# Altium PCB DriveBoard_V2.PcbDoc
Units mil, origin at the board's own origin, x right, y up, seen from the top; angles counter-clockwise.
Board outline 3149.61 x 1968.5 mil, 2 copper layers (Top Layer, Bottom Layer); 44 components, 41 nets, 152 pads, 152 vias.
Unrouted connection lines stored in the file: 1.
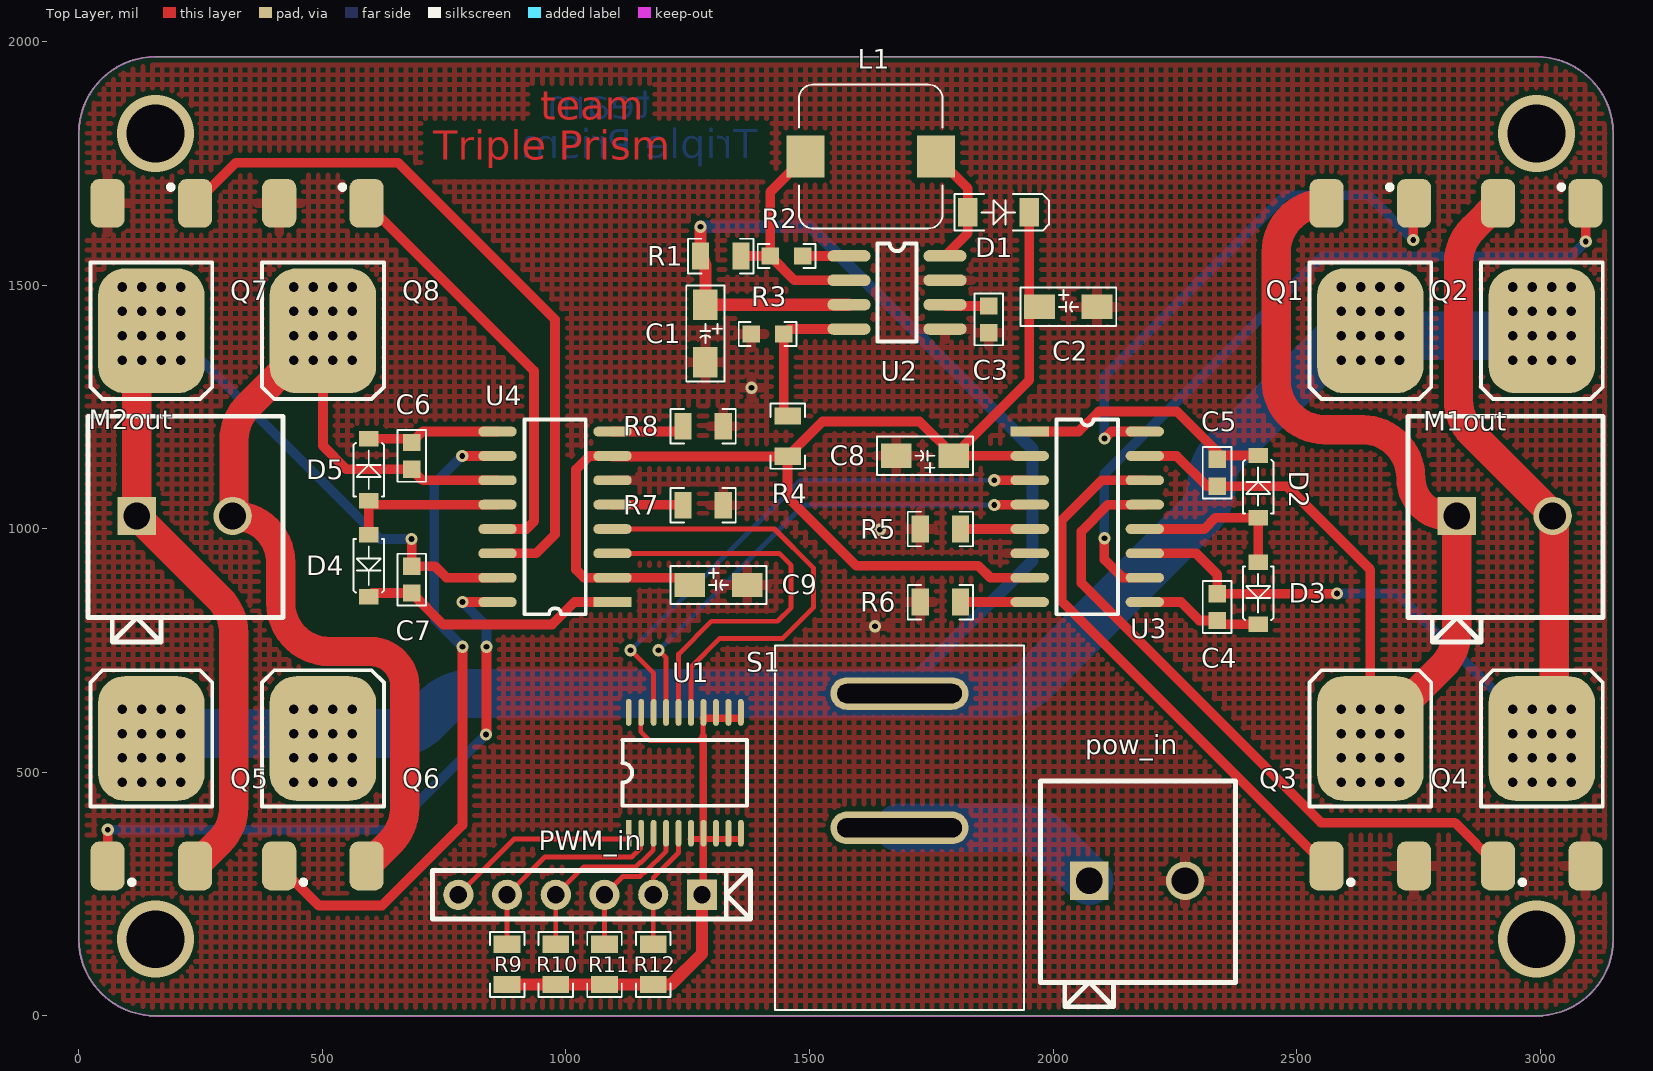
[diagram p0: Top Layer view]
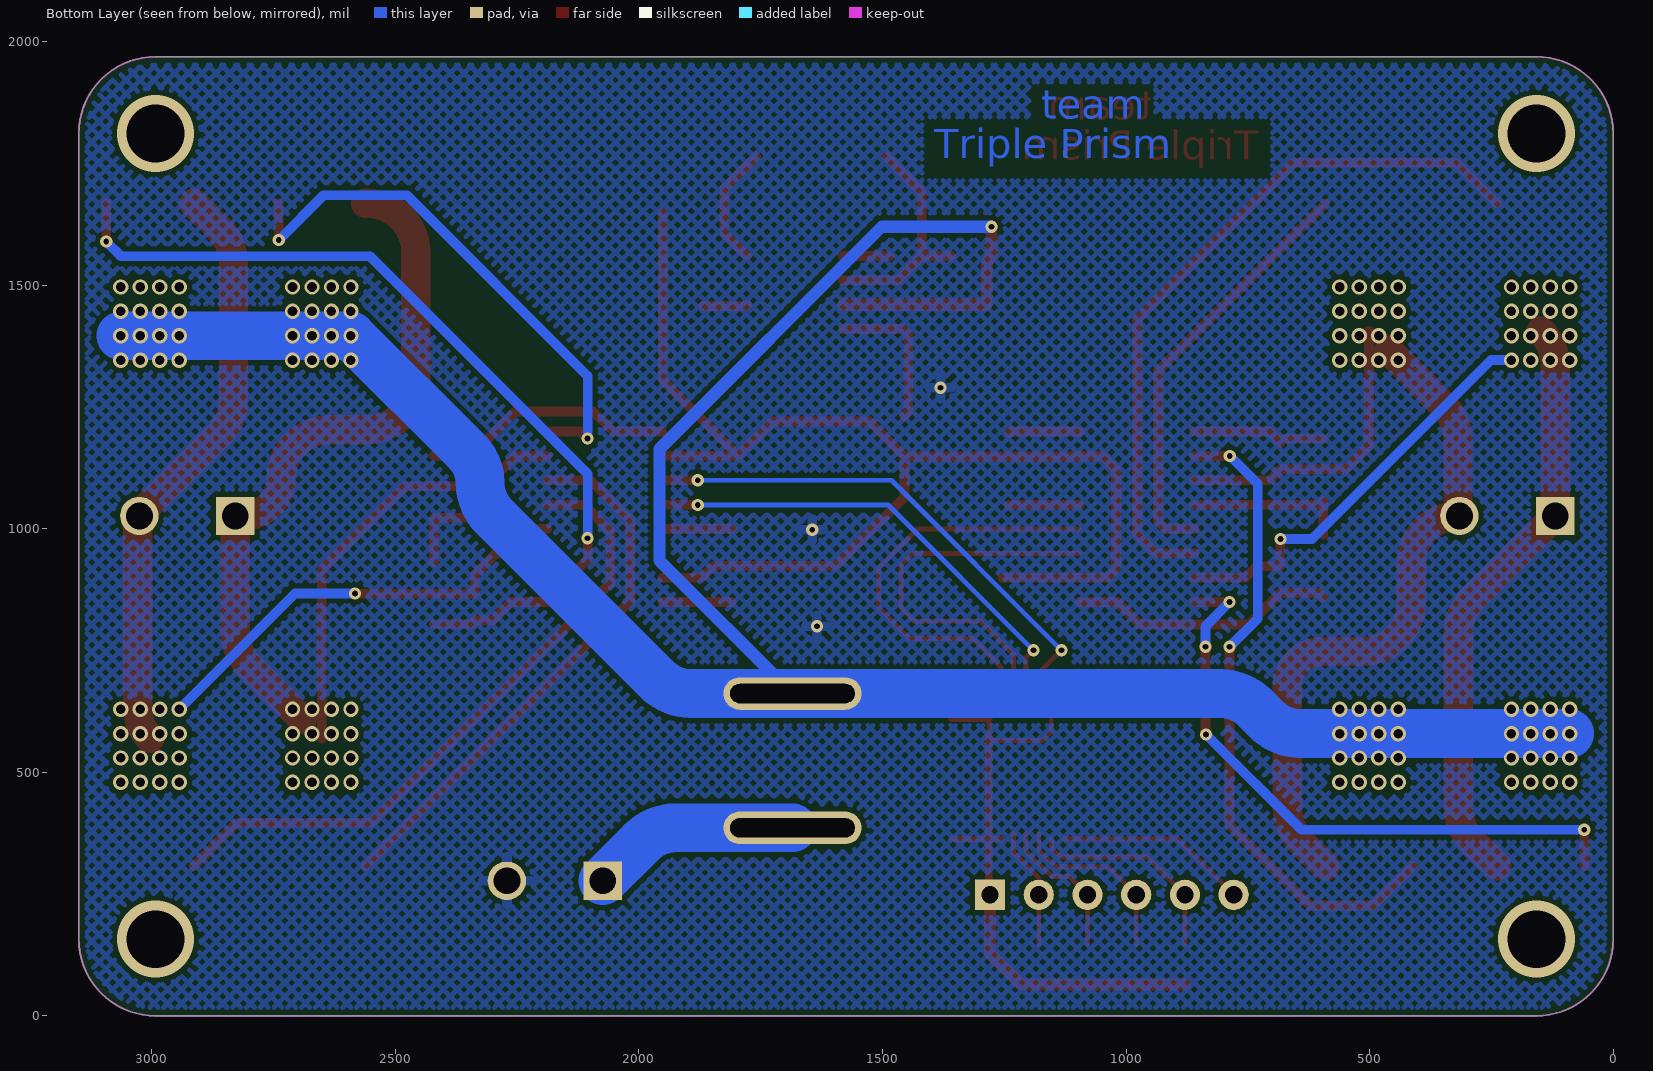
[diagram p1: Bottom Layer view, seen from below]

## Layer stack, top to bottom
Top Solder: solder mask 0.4, Solder Resist, Dk 3.5
Top Layer: signal copper 1.4
Dielectric 1: dielectric 12.6, FR-4, Dk 4.8
Bottom Layer: signal copper 1.4
Bottom Solder: solder mask 0.4, Solder Resist, Dk 3.5

## Board outline
0,157.48 0,1811.02 cw(c157.48,1811.02) 157.48,1968.5 2992.13,1968.5 cw(c2992.13,1811.02) 3149.61,1811.02 3149.61,157.48 cw(c2992.13,157.48) 2992.13,0 157.48,0 cw(c157.48,157.48)

## Design rules (kind name [scope] priority, off if disabled: settings)
Clearance [All] p1: gap=10
Clearance "Large Power Nets" [InNetClass('Large Power Nets')] p2: gap=20
PolygonConnect [All] p1: connectstyle=Relief reliefconductorwidth=20 reliefentries=4 polygonreliefangle="90 Angle" airgapwidth=10
RoutingCorners [All] p1: cornerstyle=Round minsetback=10 maxsetback=100
RoutingVias [All] p1: holewidth=28 width=50 viastyle="Through Hole" minholewidth=12 minwidth=24 maxholewidth=28 maxwidth=50
SolderMaskExpansion [All] p1: expansion=4
Width "Large Power Nets_1" [InNetClass('Large Power Nets')] p1: maxlimit=100 minlimit=10 preferedwidth=60
Width [All] p2: maxlimit=25 minlimit=10 preferedwidth=10
29 further rules are at their usual default settings.

## Classes and differential pairs
net class "Large Power Nets": 7V2 Netpow_in_1 OUT1+ OUT1- OUT2+ OUT2-

## Components (designator, comment, footprint, x,y, rotation, side; value= is the part's Value field where it differs from the comment)
C1 "Cap Pol1" "1206 C tan" 1286.22,1400.39 r270 top
C2 "Cap Pol1" "1206 C tan" 2031.1,1455.12 r0 top
C3 "Cap" "0603 C" 1867.72,1429.53 r90 top
C4 "Cap" "0603 C" 2336.62,838.98 r90 top
C5 "Cap" "0603 C" 2336.62,1114.63 r90 top
C6 "Cap" "0603 C" 683.46,1149.27 r270 top
C7 "Cap" "0603 C" 683.46,895.28 r270 top
C8 "Cap Pol1" "1206 C tan" 1737.01,1149.61 r180 top
C9 "Cap Pol1" "1206 C tan" 1312.99,884.25 r0 top
D1 "Diode" "1206 D" 1887.8,1649.21 r0 top
D2 "Diode" SOD-123 2420.87,1086.22 r90 top
D3 "Diode" SOD-123 2420.87,867.38 r270 top
D4 "Diode" SOD-123 595.27,923.69 r270 top
D5 "Diode" SOD-123 595.28,1120.87 r90 top
L1 "Inductor Iron" CDRH74R 1625.59,1763.78 r0 top
M1out "Header 2" "CONNECT 050-2" 2828.35,1025.98 r0 top
M2out "Header 2" "CONNECT 050-2" 118.9,1025.98 r0 top
pow_in "Header 2" "CONNECT 050-2" 2074.02,277.17 r0 top
PWM_in "Header 6" "Header P6" 1279.13,248.43 r180 top
Q1 "IRLR7843" LR7843 2650.94,1525.91 r90 top
Q2 "IRLR7843" LR7843 3003.15,1525.91 r90 top
Q3 "IRLR7843" LR7843 2650.94,449.29 r270 top
Q4 "IRLR7843" LR7843 3003.15,449.29 r270 top
Q5 "IRLR7843" LR7843 148.98,449.29 r270 top
Q6 "IRLR7843" LR7843 501.18,449.29 r270 top
Q7 "IRLR7843" LR7843 148.98,1525.91 r90 top
Q8 "IRLR7843" LR7843 501.18,1525.91 r90 top
R1 "Res2" "0805 R" 1317.72,1559.45 r0 top
R2 "Res2" "0603 R" 1452.76,1559.45 r180 top
R3 "Res2" "0603 R" 1413.78,1399.61 r180 top
R4 "Res2" "0805 R" 1455.12,1189.76 r90 top
R5 "Res2" "0805 R" 1768.5,999.21 r180 top
R6 "Res2" "0805 R" 1768.5,849.21 r180 top
R7 "Res2" "0805 R" 1281.5,1048.03 r0 top
R8 "Res2" "0805 R" 1281.5,1210.24 r0 top
R9 "Res2" "0805 R" 879.13,105.51 r270 top
R10 "Res2" "0805 R" 979.13,105.51 r270 top
R11 "Res2" "0805 R" 1079.13,105.51 r270 top
R12 "Res2" "0805 R" 1179.13,105.51 r270 top
S1 "SW-SPST" Switch 1684.65,385.83 r0 top
U1 "74LVC245A" SOT163-1 1128.74,374.8 r90 top
U2 "MC34063A" MC34063 1679.53,1484.65 r0 top
U3 "HIP4082" HIP4082 1951.97,1199.21 r0 top
U4 "HIP4082" HIP4082 1095.67,849.21 r180 top

## Footprints (in the part's own frame and the unit in brackets; to place one, negate y for a bottom-side part, rotate by r counter-clockwise, add the part's x,y. Pads: shape width x height; smd on the part's side, far side on the other; paste and mask are expansions set on the pad)
"0603 C" [mm]
  rect 0.9x0.9 smd: 1(-0.7,0) 2(0.7,0)
  silkscreen extent -1.35,-0.75 1.35,0.75, body extent -0.8,-0.4 0.8,0.4, height 0.8
"0603 R" [mm]
  rect 0.9x0.9 smd: 1(-0.85,0) 2(0.85,0)
  silkscreen extent -1.5,-0.63 1.5,0.63, body extent -0.8,-0.4 0.8,0.4, height 0.45
"0805 R" [mm]
  rect 0.9x1.4 smd: 1(-1.05,0) 2(1.05,0)
  silkscreen extent -1.7,-0.9 1.7,0.9, body extent -1,-0.63 1,0.63, height 0.5
"1206 C tan" [mm]
  rect 1.6x1.27 smd: 1(-1.5,0) 2(1.5,0)
  silkscreen extent -2.5,-1 2.5,1, body extent -1.6,-0.8 1.6,0.8, height 1.6
"1206 D" [mm]
  rect 1x1.5 smd: 1(-1.6,0) 2(1.6,0)
  silkscreen extent -2.3,-0.95 2.63,0.95
CDRH74R [mm]
  rect 2x2.2 smd: 1(-3.4,0) 2(3.4,0)
  silkscreen extent -3.75,-3.75 3.75,3.75, body extent -3.75,-3.75 3.75,3.75, height 4
"CONNECT 050-2" [mm]
  rect 2x2 hole 1.4: 1(0,0)
  round 2 hole 1.4: 2(5,0)
  silkscreen extent -2.54,-6.57 7.62,5.2, body extent -2.42,-2.5 7.58,5.5, height 11
"Header P6" [mil]
  rect 62x62 hole 35.5: 1(0,0)
  round 62 hole 35.5: 2(100,0) 3(200,0) 4(300,0) 5(400,0) 6(500,0)
  silkscreen extent -100,-50 553,50, body extent -50,-50 550,50, height 350
HIP4082 [mm]
  rect 2x0.51 smd: 1(0,0)
  oval 2x0.51 smd: 2(0,-1.27) 3(0,-2.54) 4(0,-3.81) 5(0,-5.08) 6(0,-6.35) 7(0,-7.62) 8(0,-8.89) 9(6,-8.89) 10(6,-7.62) 11(6,-6.35) 12(6,-5.08) 13(6,-3.81) 14(6,-2.54) 15(6,-1.27) 16(6,0)
  silkscreen extent 1.4,-9.52 4.6,0.64
LR7843 [mm]
  rrect50% 2.54x1.778 smd: 1(3.6,-2.28) 3(3.6,2.28)
  rrect50% 6.5x5.55 smd: 2(-3.048,0)
  silkscreen extent -6.6,-3.17 4.57,3.18
MC34063 [mm]
  oval 2.25x0.6 smd: 1(-2.5,1.905) 2(-2.5,0.635) 3(-2.5,-0.635) 4(-2.5,-1.905) 5(2.5,-1.905) 6(2.5,-0.635) 7(2.5,0.635) 8(2.5,1.905)
  silkscreen extent -1.02,-2.55 1.02,2.55
SOD-123 [mm]
  rect 0.8x1 smd: 1(-1.62,0) 2(1.62,0)
  silkscreen extent -1.4,-0.8 1.4,0.8
SOT163-1 [mm]
  rect 1.4x0.3 smd: 1(0,0)
  oval 1.4x0.3 smd: 2(0,-0.65) 3(0,-1.3) 4(0,-1.95) 5(0,-2.6) 6(0,-3.25) 7(0,-3.9) 8(0,-4.55) 9(0,-5.2) 10(0,-5.85) 11(6.3,-5.85) 12(6.3,-5.2) 13(6.3,-4.55) 14(6.3,-3.9) 15(6.3,-3.25) 16(6.3,-2.6) 17(6.3,-1.95) 18(6.3,-1.3) 19(6.3,-0.65) 20(6.3,0)
  silkscreen extent 1.44,-6.17 4.87,0.33
Switch [mm]
  oval 7.2x1.7 hole 1 slot 6.5 at 0 deg: 1(0,7) 2(0,0)
  silkscreen extent -6.5,-9.5 6.5,9.5, body extent -6.5,-9.5 6.5,9.5, height 15.5

## Part data
C1 C2 C8 C9: "Polarized Capacitor (Radial)"
C3 C4 C5 C6 C7: "Capacitor"
D1 D2 D3 D4 D5: "Default Diode"
L1: "Magnetic-Core Inductor"
M1out M2out pow_in: "Header, 2-Pin"
PWM_in: "Header, 6-Pin"
Q1 Q2 Q3 Q4 Q5 Q6 Q7 Q8: library part NMOS-2, "N-Channel Power MOSFET"
R1 R2 R3 R4 R5 R6 R7 R8 R9 R10 R11 R12: "Resistor"
S1: "Single-Pole, Single-Throw Switch"

## Via types
v1: diameter 31.5, hole 19.68, Top Layer to Bottom Layer, 128 vias
v2: diameter 25, hole 12, Top Layer to Bottom Layer, 20 vias
v3: diameter 157.48, hole 118.11, Top Layer to Bottom Layer, 4 vias

## Nets (pads, with @x,y where several pads share a name; then routed paths per layer and width w, separated by ;. In a path a pad name is that pad's centre, name@x,y a point inside that pad or via, vN(x,y) a via of type N, cw(c..) or ccw(c..) an arc to the next point about the centre after c; other vN are vias at no path point)
3V3: PWM_in.6 U1.1 U1.20 | length 396.1
  Top Layer w10: PWM_in.6 893.31,362.6 U1.1@1127.95,362.6
7V2: C1.1 Q1.2 Q2.2 Q5.2 Q6.2 R1.1 S1.1 U2.3 | length 5280.2
  Top Layer w25: v2(1275.98,1619.69) 1275.98,1560.4 ccw(c1277.33,1560.4) R1.1 cw(c1252.62,1535.69) 1286.22,1535.69 C1.1 1580.9,1459.45 U2.3
  Bottom Layer w25: v2(1275.98,1619.69) 1501.18,1619.69 1957.48,1163.39 1957.48,934.25 S1.1
  Bottom Layer w100: v1(88.98,579.29) v1(128.98,579.29) v1(168.98,579.29) v1(208.98,579.29) v1(441.18,579.29) v1(481.18,579.29) v1(521.18,579.29) v1(561.18,579.29) 641.41,579.29 ccw(c641.41,679.29) 712.12,608.58 735.67,632.13 cw(c806.38,561.42) 806.38,661.42 S1.1 1892.44,661.42 ccw(c1892.44,761.42) 1963.15,690.71 2296.7,1024.25 ccw(c2225.98,1094.96) 2325.98,1094.96 cw(c2412.85,1094.96) 2351.43,1156.39 v1(2590.94,1395.91) v1(2710.94,1395.91) v1(2983.15,1395.91) v1(3063.15,1395.91)
  other v1: 88.98,479.29 128.98,479.29 168.98,479.29 208.98,479.29 441.18,479.29 481.18,479.29 521.18,479.29 561.18,479.29 88.98,529.29 128.98,529.29 168.98,529.29 208.98,529.29 441.18,529.29 481.18,529.29 521.18,529.29 561.18,529.29 88.98,629.29 128.98,629.29 168.98,629.29 208.98,629.29 441.18,629.29 481.18,629.29 521.18,629.29 561.18,629.29 2590.94,1345.91 2630.94,1345.91 2670.94,1345.91 2710.94,1345.91 2943.15,1345.91 2983.15,1345.91 3023.15,1345.91 3063.15,1345.91 2630.94,1395.91 2670.94,1395.91 2943.15,1395.91 3023.15,1395.91 2590.94,1445.91 2630.94,1445.91 2670.94,1445.91 2710.94,1445.91 2943.15,1445.91 2983.15,1445.91 3023.15,1445.91 3063.15,1445.91 2590.94,1495.91 2630.94,1495.91 2670.94,1495.91 2710.94,1495.91 2943.15,1495.91 2983.15,1495.91 3023.15,1495.91 3063.15,1495.91
12V: C2.1 C8.1 C9.1 D1.2 R4.1 U3.2 U3.7 U4.2 U4.7 | length 2662.1
  Top Layer w20: C9.1@1253.94,899.21 U4.2 1037.01,899.21 1020.47,915.75 1020.47,1121.65 1048.03,1149.21 U4.7 1095.67,1148.11 R4.1@1454.8,1148.11 ; D1.2 1950.79,1304.33 C8.1 ; U3.7 1870.87,899.21 1846.46,923.62 1596.06,923.62 1454.8,1064.88 R4.1@1454.8,1148.11 ; U3.2 1951.57,1149.61 C8.1 ; R4.1@1454.8,1148.11 R4.1 1526.77,1220.08 1725.59,1220.08 C8.1
AHO1: Q2.1 U3.10 | length 1538.7
  Top Layer w20: v2(2105.12,980.32) 2105.12,936.61 2142.52,899.21 U3.10 ; Q2.1 3093.31,1667.25 v2(3093.31,1589.37)
  Bottom Layer w20: v2(2105.12,980.32) 2105.12,1112.6 2551.57,1559.06 3062.99,1559.06 v2(3093.31,1589.37)
AHO2: Q6.1 U4.10 | length 1356
  Top Layer w20: Q6.1 492.6,226.38 622.44,226.38 787.4,391.34 v2(787.4,757.48) ; v2(787.01,1149.21) U4.10
  Bottom Layer w20: v2(787.01,1149.21) 729.53,1091.73 729.53,815.35 v2(787.4,757.48)
ALO1: Q4.1 U3.13 | length 1355.3
  Top Layer w20: U3.13 2112.6,1049.21 2057.87,994.49 2057.87,888.19 2549.61,396.46 2824.49,396.46 Q4.1
ALO2: Q8.1 U4.13 | length 876.8
  Top Layer w20: Q8.1 934.65,1323.94 934.65,1014.96 918.9,999.21 U4.13
BHO1: Q1.1 U3.16 | length 1118.6
  Top Layer w20: v2(2105.12,1185.04) 2119.29,1199.21 U3.16 ; v2(2738.98,1592.52) 2738.98,1665.91 Q1.1
  Bottom Layer w20: v2(2105.12,1185.04) 2105.12,1313.39 2475.98,1684.25 2647.24,1684.25 v2(2738.98,1592.52)
BHO2: Q5.1 U4.16 | length 1296.6
  Top Layer w20: Q5.1 59.45,307.79 v2(59.45,381.89) ; v2(787.4,849.21) U4.16 ; v2(835.83,577.56) 837.01,578.74 v2(837.01,757.48)
  Bottom Layer w20: v2(59.45,381.89) 640.16,381.89 v2(835.83,577.56) ; v2(787.4,849.21) 837.01,799.61 v2(837.01,757.48)
BLO1: Q3.1 U3.14 | length 1139.9
  Top Layer w20: U3.14 2099.61,1099.21 2016.93,1016.54 2016.93,851.81 Q3.1
BLO2: Q7.1 U4.14 | length 1482.3
  Top Layer w20: Q7.1 322.28,1751.18 655.51,1751.18 977.56,1429.13 977.56,987.8 938.98,949.21 U4.14
GND: PWM_in.1 R9.2 R10.2 R11.2 R12.2 U1.6 U1.7 U1.8 U1.9 U1.10 U1.11 U1.12 U1.13 U1.14 U1.19 | length 1256
  Top Layer w10: U1.19@1153.54,610.63 1153.54,583.07 1171.26,565.35 1272.44,565.35 1281.5,574.41 U1.14@1281.5,610.63
  Top Layer w12: U1.6@1255.9,362.6 1281.5,362.6 U1.10@1358.27,362.6
  Top Layer w15: PWM_in.1 1281.5,250.79 1281.5,362.6 1281.5,574.41 ; U1.14@1281.5,610.63 1307.87,610.63 U1.11@1358.27,610.63
  Top Layer w25: R9.2 R10.2 R11.2 R12.2 1215.75,64.17 1279.13,127.56 PWM_in.1
IN1+: U1.18 U3.3 | length 1110.9
  Top Layer w10: v2(1132.68,750.39) 1179.92,703.15 U1.18
  Top Layer w20: v2(1879.13,1099.21) U3.3
  Bottom Layer w10: v2(1132.68,750.39) 1481.5,1099.21 v2(1879.13,1099.21)
IN1-: U1.17 U3.4 | length 1019.5
  Top Layer w10: v2(1190.16,750.39) 1205.51,735.04 U1.17
  Top Layer w20: v2(1879.13,1048.43) 1879.92,1049.21 U3.4
  Bottom Layer w10: v2(1190.16,750.39) 1488.19,1048.43 v2(1879.13,1048.43)
IN2+: U1.16 U4.3 | length 853.9
  Top Layer w10: U4.3 1437.8,949.21 1462.2,924.8 1462.2,837.8 1434.25,809.84 1298.43,809.84 1231.1,742.52 U1.16
IN2-: U1.15 U4.4 | length 921.5
  Top Layer w10: U4.4 1427.95,999.21 1507.87,919.29 1507.87,837.8 1444.88,774.8 1315.75,774.8 1256.69,715.75 U1.15
NetC3_2: C3.2 U2.6 | length 90.8
  Top Layer w20: U2.6 1780.51,1457.09 C3.2
NetC4_1: C4.1 D3.2 U3.9 | length 251.6
  Top Layer w20: U3.9 2262.2,849.21 2300,811.42 C4.1 2344.43,803.61 D3.2
NetC5_2: C5.2 D2.2 U3.1 | length 523.5
  Top Layer w20: U3.1 2052.36,1199.21 2093.7,1240.55 2253.87,1240.55 2344.42,1150 D2.2
NetC6_1: C6.1 D5.2 U4.9 | length 276.7
  Top Layer w20: D5.2 675.65,1184.64 C6.1 705.85,1199.21 U4.9
NetC7_2: C7.2 D4.2 U4.1 | length 549.5
  Top Layer w20: D4.2 603.09,867.72 C7.2 748.03,803.15 971.65,803.15 1017.72,849.21 U4.1
NetD1_1: D1.1 L1.2 U2.8 | length 250.6
  Top Layer w20: L1.2 1824.8,1698.42 D1.1 1824.8,1606.5 U2.8
NetD2_1: D2.1 D3.1 U3.12 | length 333.6
  Top Layer w20: U3.12 2310.24,999.21 2333.46,1022.44 D2.1 D3.1
NetD4_1: D4.1 D5.1 U4.12 | length 337.1
  Top Layer w20: D4.1 D5.1 603.15,1049.21 U4.12
NetL1_1: L1.1 R1.2 R2.2 U2.2 | length 477
  Top Layer w20: R1.2 R2.2 ; L1.1 1419.29,1691.34 R2.2 ; U2.2 1469.09,1509.65 R2.2
Netpow_in_1: pow_in.1 S1.2 | length 430.1
  Bottom Layer w100: S1.2 1923.93,385.83 cw(c1923.93,285.83) 1994.64,356.54 pow_in.1
NetR2_1: R2.1 U2.1 | length 95
  Top Layer w20: R2.1 1580.9,1559.45 U2.1
NetR3_1: R3.1 R4.2 U2.4 | length 309.8
  Top Layer w20: R4.2 1447.24,1238.98 R3.1 1457.28,1409.65 U2.4
NetR5_1: R5.1 U3.5 | length 142.1
  Top Layer w20: R5.1 U3.5
NetR6_1: R6.1 U3.8 | length 142.1
  Top Layer w20: R6.1 U3.8
NetR7_1: R7.1 U4.5 | length 145
  Top Layer w20: U4.5 1238.98,1049.21 R7.1
NetR8_1: R8.1 U4.8 | length 144.8
  Top Layer w20: U4.8 1235.43,1199.21 R8.1@1238.98,1195.67
OUT1+: C5.1 M1out.1 Q1.3 Q3.2 U3.15 | length 2328.7
  Top Layer w20: U3.15 2253.54,1149.21 2315.68,1087.07 C5.1 2479.46,1087.07 2650.94,915.59 Q3.2
  Top Layer w60: Q1.3 2557.87,1667.64 ccw(c2557.87,1567.64) 2457.87,1567.64 2457.87,1303.15 ccw(c2557.87,1303.15) 2557.87,1203.15 2634.25,1203.15 cw(c2634.25,1103.15) 2734.25,1103.15 ccw(c2811.42,1103.15) 2811.42,1025.98 2828.35,1025.98 2828.35,788.12 cw(c2728.35,788.12) 2799.06,717.4 v1(2710.94,629.29) Q3.2@2690.94,609.29
  other v1: 2590.94,479.29 2630.94,479.29 2670.94,479.29 2710.94,479.29 2590.94,529.29 2630.94,529.29 2670.94,529.29 2710.94,529.29 2590.94,579.29 2630.94,579.29 2670.94,579.29 2710.94,579.29 2590.94,629.29 2630.94,629.29 2670.94,629.29
OUT1-: C4.2 M1out.2 Q2.3 Q4.2 U3.11 | length 2122.7
  Top Layer w20: U3.11 2293.7,949.21 2336.62,906.3 C4.2 2581.89,866.54 v2(2582.28,866.93)
  Top Layer w60: Q2.3 2861.18,1615.43 ccw(c2931.89,1544.72) 2831.89,1544.72 2831.89,1263.86 ccw(c2931.89,1263.86) 2861.18,1193.15 3028.35,1025.98 3028.35,630.12 cw(c2942.32,630.12) Q4.2
  Bottom Layer w20: v2(2582.28,866.93) 2705.51,866.93 v1(2943.15,629.29)
  other v1: 2943.15,479.29 2983.15,479.29 3023.15,479.29 3063.15,479.29 2943.15,529.29 2983.15,529.29 3023.15,529.29 3063.15,529.29 2943.15,579.29 2983.15,579.29 3023.15,579.29 3063.15,579.29 2983.15,629.29 3023.15,629.29 3063.15,629.29
OUT2+: C7.1 M2out.1 Q5.3 Q7.2 U4.15 | length 2080.2
  Top Layer w20: v2(683.07,978.74) 683.46,978.35 C7.1 730.71,922.83 754.33,899.21 U4.15
  Top Layer w60: Q7.2@148.19,1405.12 ccw(c218.9,1334.41) 118.9,1334.41 M2out.1 288.82,856.06 cw(c218.11,785.35) 318.11,785.35 318.11,428.35 cw(c218.11,428.35) 288.82,357.64 Q5.3
  Bottom Layer w20: v1(208.98,1345.91) 250.94,1345.91 618.11,978.74 v2(683.07,978.74)
  other v1: 88.98,1345.91 128.98,1345.91 168.98,1345.91 88.98,1395.91 128.98,1395.91 168.98,1395.91 208.98,1395.91 88.98,1445.91 128.98,1445.91 168.98,1445.91 208.98,1445.91 88.98,1495.91 128.98,1495.91 168.98,1495.91 208.98,1495.91
OUT2-: C6.2 M2out.2 Q6.3 Q8.2 U4.11 | length 2000.4
  Top Layer w20: Q8.2 501.18,1170.08 549.55,1121.71 C6.2 705.97,1099.21 U4.11
  Top Layer w60: Q8.2@461.18,1365.91 v1(441.18,1345.91) 348.19,1252.91 ccw(c418.9,1182.2) 318.9,1182.2 318.9,1025.98 cw(c318.9,930.32) 320,1025.98 cw(c318.9,930.32) 414.57,930.32 414.57,847.79 ccw(c514.57,847.79) 514.57,747.79 598.82,747.79 cw(c598.82,677.71) 668.9,677.71 668.9,426.93 cw(c568.9,426.93) 639.61,356.22 Q6.3
  other v1: 481.18,1345.91 521.18,1345.91 561.18,1345.91 441.18,1395.91 481.18,1395.91 521.18,1395.91 561.18,1395.91 441.18,1445.91 481.18,1445.91 521.18,1445.91 561.18,1445.91 441.18,1495.91 481.18,1495.91 521.18,1495.91 561.18,1495.91
PGND: C1.2 C2.2 C3.1 C8.2 C9.2 pow_in.2 Q3.3 Q4.3 Q7.3 Q8.3 R3.2 R5.2 R6.2 R7.2 R8.2 U2.5 U2.7 U3.6 U4.6
  other v2: 1634.65,799.61 1644.09,997.64 1380.71,1288.98
PWM1+: PWM_in.5 R9.1 U1.2 | length 434.1
  Top Layer w10: R9.1 PWM_in.5 956.69,325.98 1135.07,325.98 1143.51,334.43 1143.87,334.43 1153.15,343.7 1153.15,362.21 U1.2@1153.54,362.6
PWM1-: PWM_in.4 R10.1 U1.3 | length 374.4
  Top Layer w10: R10.1 PWM_in.4 1036.69,305.98 1143.36,305.98 1151.8,314.43 1153.8,314.43 1179.13,339.76 U1.3@1179.13,374.8
PWM2+: PWM_in.3 R11.1 U1.4 | length 301.9
  Top Layer w10: R11.1 PWM_in.3 1116.69,285.98 1151.64,285.98 1160.08,294.43 1162.08,294.43 1205.51,337.86 U1.4
PWM2-: PWM_in.2 R12.1 U1.5 | length 249.5
  Top Layer w10: R12.1 PWM_in.2 1179.13,283.2 1231.1,335.16 U1.5
copper on no net:
  other v3: 157.48,157.48 2992.13,157.48 157.48,1811.02 2992.13,1811.02

## Polygon pours and split planes (outlines as drawn)
PGND on Top Layer "Top Layer-PGND Net" (hatched 90Degree grid 20 track 10, remove dead copper, pour order 4): 16.93,233.07 16.93,154.33 ccw(c156.69,154.33) 156.69,14.57 348.03,14.57 3006.69,14.57 ccw(c3006.69,143.31) 3135.43,143.31 3135.43,190.16 3135.43,1813.39 ccw(c2992.91,1813.39) 2992.91,1955.91 2974.8,1955.91 155.12,1955.91 ccw(c155.12,1817.72) 16.93,1817.72 16.93,224.8
PGND on Bottom Layer "Top Layer-PGND Net" (hatched 45Degree grid 20 track 10, remove dead copper, pour order 6): 16.93,233.46 16.93,154.72 ccw(c156.69,154.72) 156.69,14.96 348.03,14.96 3006.69,14.96 ccw(c3006.69,143.7) 3135.43,143.7 3135.43,190.55 3135.43,1813.78 ccw(c2992.91,1813.78) 2992.91,1956.3 2974.8,1956.3 155.12,1956.3 ccw(c155.12,1818.11) 16.93,1818.11 16.93,225.2

## Keep-outs
Keep-Out Layer:
  the board outline again, w3.94

## Other copper
Top Layer:
  text "team" at 946.85,1838.98 h60
  text "Triple Prism" at 727.56,1757.09 h60
Bottom Layer:
  text "team" at 1174.51,1841.73 h60
  text "Triple Prism" at 1393.8,1759.84 h60

## Silkscreen, mask and mechanical layers (free items; w line width, h text height)
Top Solder:
  region: 931.5,1831.5 712.2,1831.5 712.2,1721.26 1409.84,1721.26 1409.84,1831.5 1170.87,1831.5 1170.87,1904.33 931.5,1904.33
Bottom Solder:
  region: 710.24,1832.28 710.24,1720.47 1413.78,1720.47 1413.78,1832.68 1171.26,1832.68 1171.26,1905.51 930.71,1905.51 930.71,1832.28